# Altium PCB 八入八出继电器工控板.PCBDOC (part 1 of 2)
Units mm, origin at the board's own origin, x right, y up, seen from the top; angles counter-clockwise.
Board outline 152.4 x 101.6 mm, 2 copper layers (Top Layer, Bottom Layer); 79 components, 86 nets, 285 pads, 7 vias.
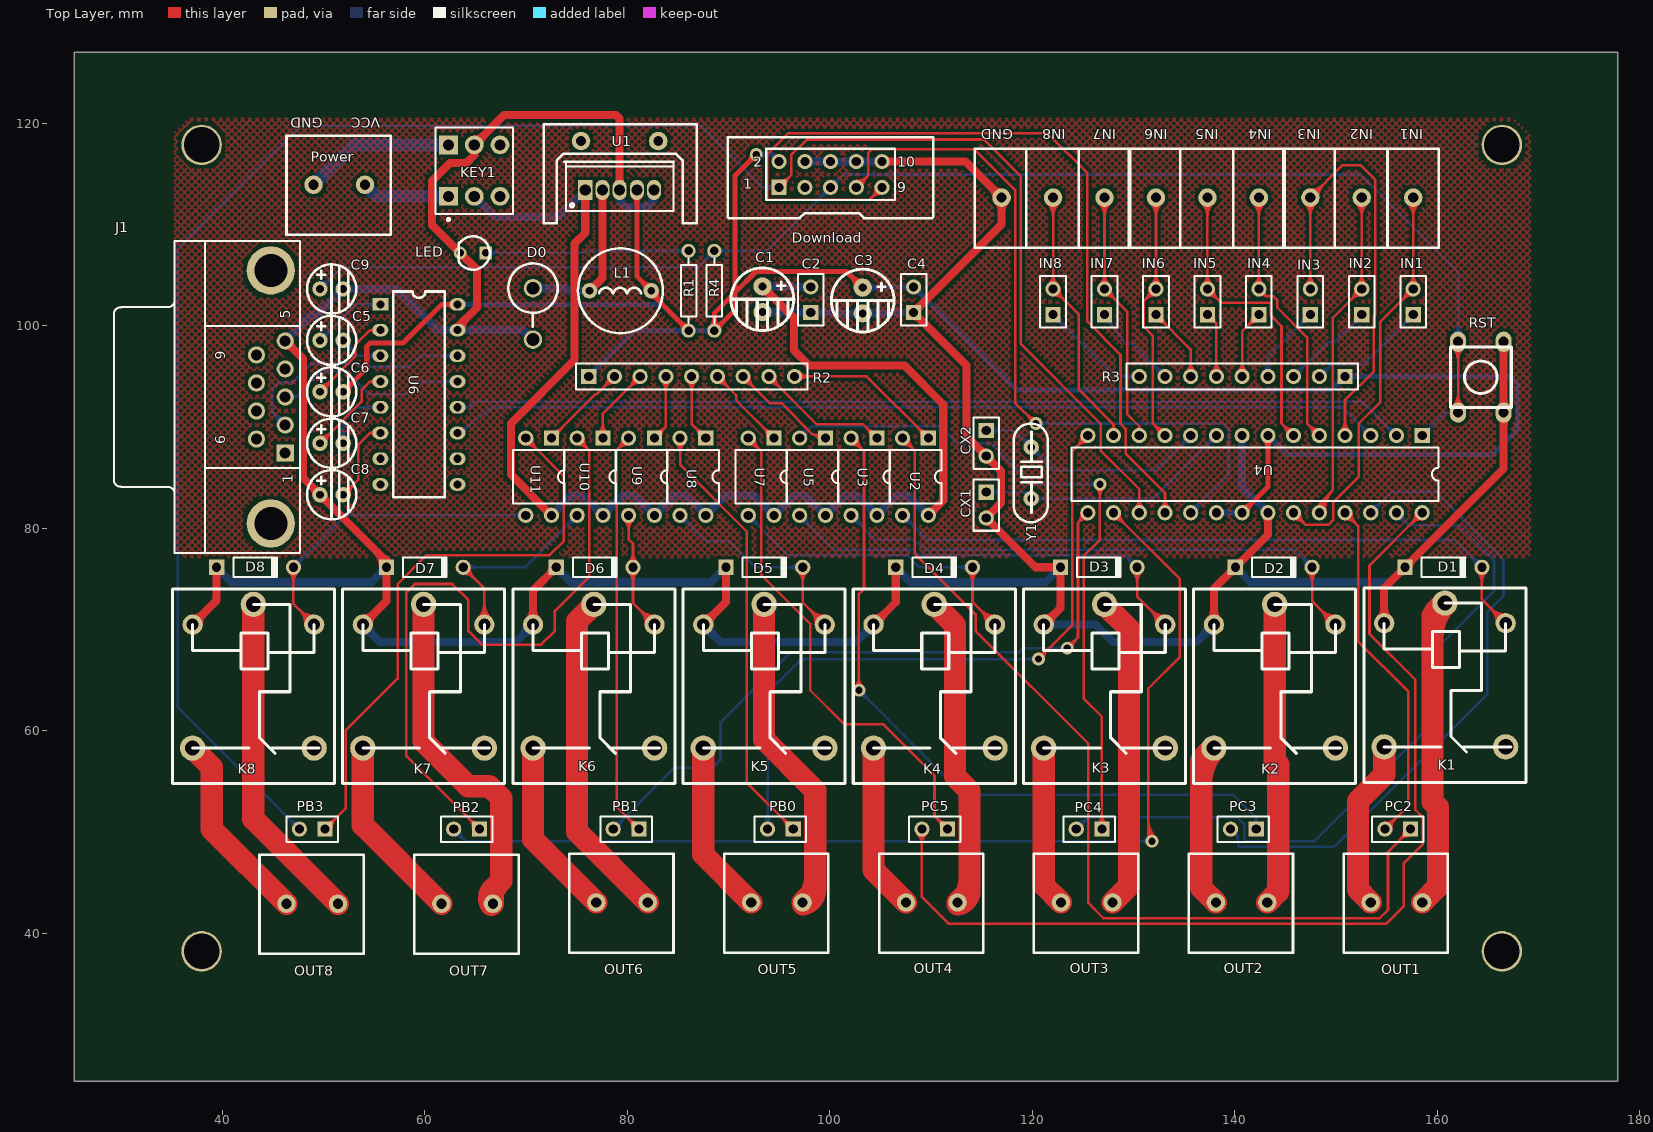
[diagram p0: Top Layer view]
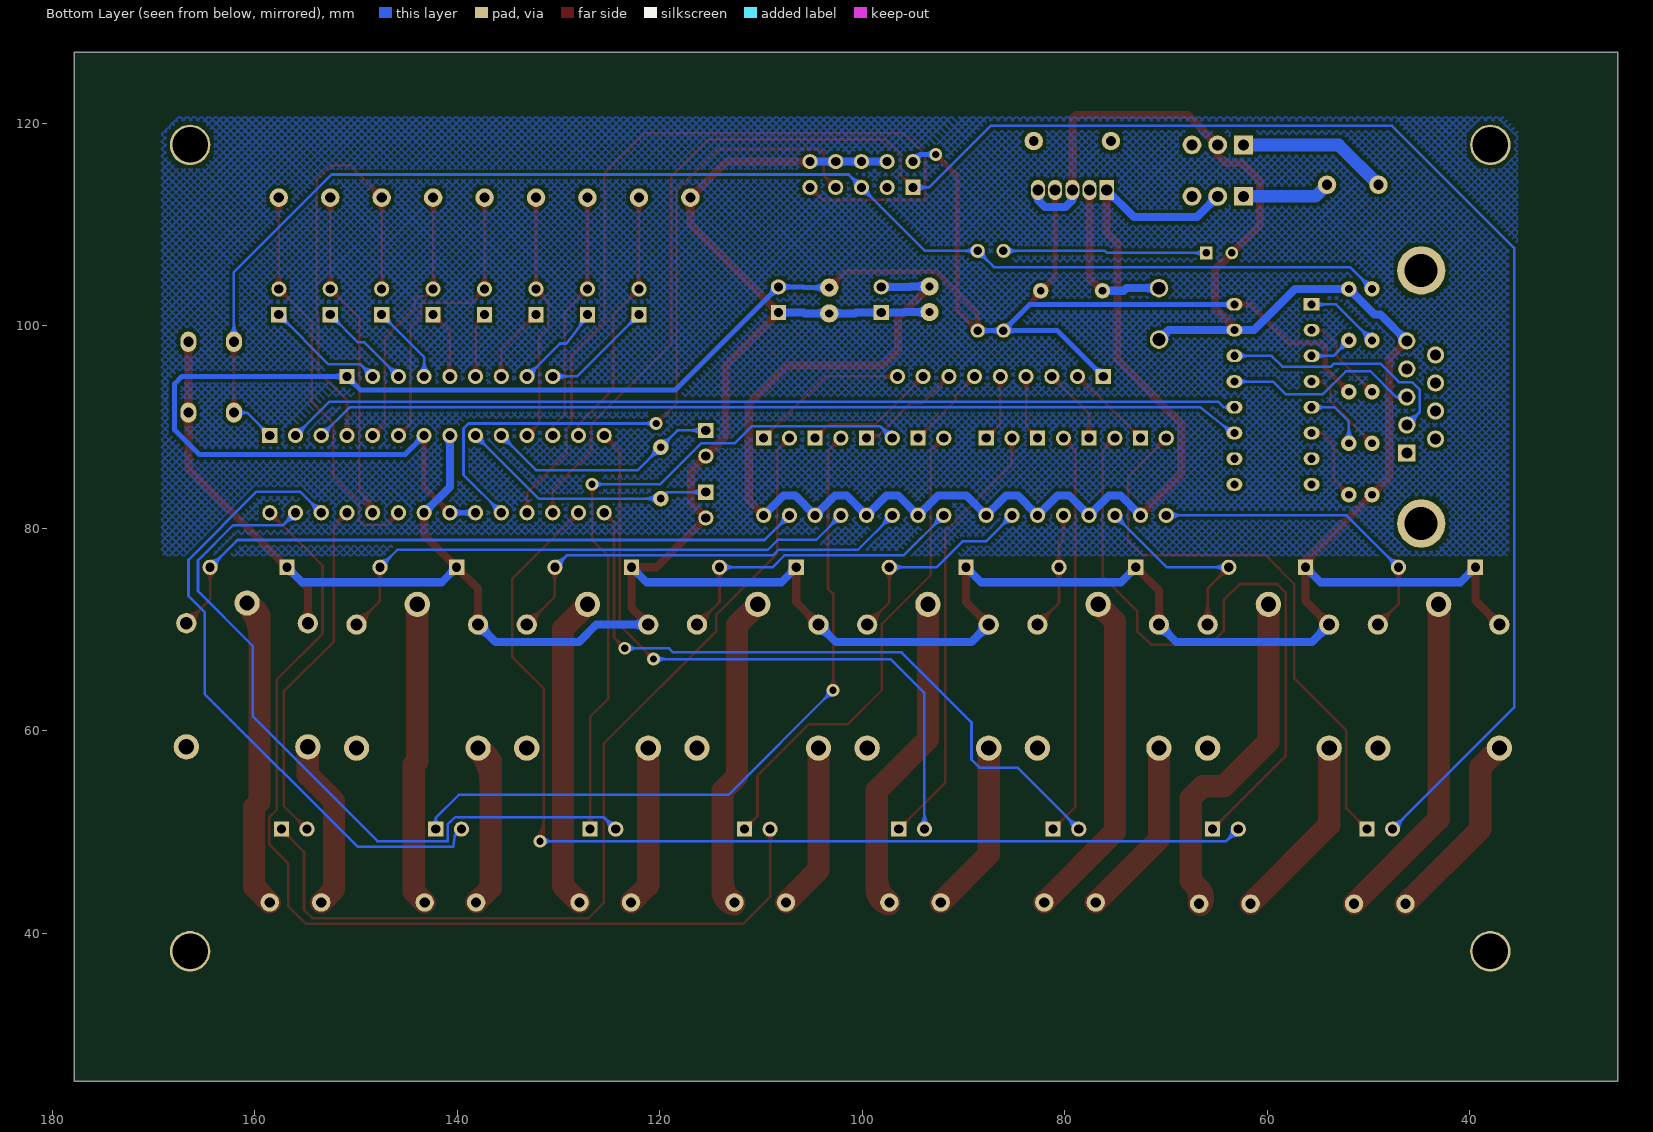
[diagram p1: Bottom Layer view, seen from below]

## Layer stack, top to bottom
Top Layer: signal copper 0.0356
Dielectric: dielectric 0.32, FR-4, Dk 4.8
Bottom Layer: signal copper 0.0356

## Board outline
25.4,25.4 177.8,25.4 177.8,127 25.4,127

## Design rules (kind name [scope] priority, off if disabled: settings)
Clearance [All] p1: gap=0.3
ComponentClearance [All] p1: gap=0.254 collisioncheckmode=3 verticalgap=0.254
PlaneClearance [All] p1: clearance=0.8
PolygonConnect [All] p1: connectstyle=Relief reliefconductorwidth=0.254 reliefentries=4 polygonreliefangle="90 Angle"
RoutingVias [All] p1: holewidth=0.711 width=1.27 viastyle="Through Hole" minholewidth=0.711 minwidth=1.27 maxholewidth=0.711 maxwidth=1.27
SolderMaskExpansion [All] p1: expansion=0.102
TestPointUsage [All] p1: valid=0 allowmultiple=FALSE
Testpoint [All] p1: side=15 testpointundercomponent=TRUE minsize=1.016 maxsize=2.54 preferedsize=1.524 minholesize=0 maxholesize=1.016 preferedholesize=0.813 testpointgrid=0.025 style=1023 order=0123456789
Width Width_7 [InNet('VCC')] p1: maxlimit=0.5 minlimit=0.5 preferedwidth=0.5
Width Width_6 [InNet('NetD0_1')] p2: maxlimit=0.8 minlimit=0.8 preferedwidth=0.8
Width Width_1 [InNet('+12V')] p3: maxlimit=0.8 minlimit=0.8 preferedwidth=0.8
Width Width_3 [InNet('GND')] p4: maxlimit=0.8 minlimit=0.8 preferedwidth=0.8
Width Width_2 [(InNet('NetK1_1') OR InNet('NetK1_3') OR InNet('NetK2_1') OR InNet('NetK2_3') OR InNet('NetK3_1') OR InNet('NetK3_3') OR InNet('NetK4_1') OR InNet('NetK4_3') OR InNet('NetK5_1') OR InNet('NetK5_3') OR InNet('NetK6_1') OR InNet('NetK6_3') OR InNet('NetK7_1') OR InNet('NetK7_3') OR InNet('NetK8_1') OR InNet('NetK8_3'))] p5: maxlimit=2.2 minlimit=2.2 preferedwidth=2.2
Width Width_5 [InNet('NetKEY1_6')] p6: maxlimit=1.254 minlimit=1.254 preferedwidth=1.254
Width Width_4 [InNet('NetKEY1_1')] p7: maxlimit=1.254 minlimit=1.254 preferedwidth=1.254
Width [All] p8: maxlimit=0.254 minlimit=0.254 preferedwidth=0.254
16 further rules are at their usual default settings.

## Classes and differential pairs
component class 八入八出继电器工控板: C1 C2 C3 C4 C5 C6 C7 C8 C9 CX1 CX2 D0 D1 D2 D3 D4 D5 D6 D7 D8 Download IN4 IN5 IN6 IN7 IN8 J1 K1 K2 K3 K4 K5 K6 K7 K8 KEY1 L1 LED OUT1 OUT2 OUT3 OUT4 OUT5 OUT6 OUT7 OUT8 PB0 PC2 PC3 PC4 PC5 Power R1 R2 R3 R4 RST U1 U2 U3 U4 U5 U6 U7 U8 U9 U10 U11 Y1

## Components (designator, comment, footprint, x,y, rotation, side; value= is the part's Value field where it differs from the comment)
C1 "DJDR" C-DJ-6 93.421,101.295 r270 top
C2 "CPDR" CPDR 98.12,102.565 r90 top
C3 "DJDR" C-DJ-6 103.327,101.168 r270 top
C4 "CPDR" CPDR 108.28,102.565 r90 top
C5 "10uf" C-DJ-4 52.07,96.012 r0 top
C6 "10uf" C-DJ-4 52.07,90.932 r0 top
C7 "10uf" C-DJ-4 52.07,85.852 r0 top
C8 "10uf" C-DJ-4 52.07,80.772 r0 top
C9 "10uf" C-DJ-4 52.07,101.092 r0 top
CX1 "30p" HDR1X2 115.443,83.566 r270 top
CX2 "30p" HDR1X2 115.443,89.662 r270 top
D0 "WY2JG" ZCDZL 73.228,101.168 r0 top
D1 "ZL2JG" D-ZL-10 164.338,76.2 r0 top
D2 "ZL2JG" D-ZL-10 147.574,76.2 r0 top
D3 "ZL2JG" D-ZL-10 130.302,76.2 r0 top
D4 "ZL2JG" D-ZL-10 114.046,76.2 r0 top
D5 "ZL2JG" D-ZL-10 97.282,76.2 r0 top
D6 "ZL2JG" D-ZL-10 80.518,76.2 r0 top
D7 "ZL2JG" D-ZL-10 63.754,76.2 r0 top
D8 "ZL2JG" D-ZL-10 46.99,76.2 r0 top
Download "Download" HDR-2x5 100.076,113.792 r0 top (schematic designator 1)
IN1 "LED" HDR1X2 157.607,101.092 r90 top (schematic designator PD1)
IN1 "PZ_3" JK128_3 152.654,110.744 r270 top
IN2 "LED" HDR1X2 152.527,101.092 r90 top (schematic designator PD2)
IN2 "PZ_3" JK128_3 137.414,110.744 r270 top
IN3 "LED" HDR1X2 147.447,101.092 r90 top (schematic designator PD3)
IN3 "" JK128_3 122.174,110.744 r270 top
IN4 "LED" HDR1X2 142.367,101.092 r90 top (schematic designator PD4)
IN5 "LED" HDR1X2 137.287,101.092 r90 top (schematic designator PD5)
IN6 "LED" HDR1X2 132.207,101.092 r90 top (schematic designator PD6)
IN7 "LED" HDR1X2 127.127,101.092 r90 top (schematic designator PD7)
IN8 "LED" HDR1X2 122.047,101.092 r90 top (schematic designator PD8)
J1 "D Connector 9" DSUB1.385-2H9 35.306,92.964 r90 top
K1 "JDQYCK" JQC-3F/T73 155.248,72.136 r270 top
K2 "JDQYCK" JQC-3F/T73 138.44,72.009 r270 top
K3 "JDQYCK" JQC-3F/T73 121.632,72.009 r270 top
K4 "JDQYCK" JQC-3F/T73 104.824,72.009 r270 top
K5 "JDQYCK" JQC-3F/T73 88.016,72.009 r270 top
K6 "JDQYCK" JQC-3F/T73 71.208,72.009 r270 top
K7 "JDQYCK" JQC-3F/T73 54.4,72.009 r270 top
K8 "JDQYCK" JQC-3F/T73 37.592,72.009 r270 top
KEY1 "SW-DPST" DPDT-6 64.897,115.316 r90 top
L1 "DG" L_DG 82.372,105.232 r0 top
LED "LED" LED_D 64.262,105.664 r180 top
OUT1 "PZ_2" DYDZ 157.988,41.91 r270 top
OUT2 "PZ_2" DYDZ 142.693,41.91 r270 top
OUT3 "PZ_2" DYDZ 127.399,41.91 r270 top
OUT4 "PZ_2" DYDZ 112.105,41.91 r270 top
OUT5 "PZ_2" DYDZ 96.81,41.91 r270 top
OUT6 "PZ_2" DYDZ 81.516,41.91 r270 top
OUT7 "PZ_2" DYDZ 66.221,41.783 r270 top
OUT8 "PZ_2" DYDZ 50.927,41.783 r270 top
PB0 "" CPDR 95.123,50.292 r180 top (schematic designator PB1)
PB1 "" CPDR 79.883,50.292 r180 top (schematic designator PB2)
PB2 "" CPDR 64.135,50.292 r180 top (schematic designator PB3)
PB3 "" CPDR 48.895,50.292 r180 top (schematic designator PB4)
PC2 "" CPDR 156.083,50.292 r180 top (schematic designator PC1)
PC3 "" CPDR 140.843,50.292 r180 top (schematic designator PC2)
PC4 "" CPDR 125.603,50.292 r180 top (schematic designator PC3)
PC5 "" CPDR 110.363,50.292 r180 top (schematic designator PC4)
Power "PZ_2" JK128_2 53.594,112.776 r270 top (schematic designator Prower)
R1 "Res" RSE 86.055,103.454 r270 top
R2 "" HDR-9 91.44,94.996 r0 top
R3 "" HDR-9 135.636,94.996 r180 top
R4 "10k" RSE 88.595,103.454 r270 top
RST "" an-6*6 169.418,101.092 r90 top
U1 "LM2576T5.0" T05A 79.248,113.411 r0 top
U2 "GO" DIP-4 108.458,85.09 r180 top
U3 "GO" DIP-4 103.378,85.09 r180 top
U4 "ATmega8" DIP-28 141.986,85.344 r180 top
U5 "GO" DIP-4 98.298,85.09 r180 top
U6 "MAX232" DIP16 55.626,102.108 r0 top
U7 "GO" DIP-4 93.218,85.09 r180 top
U8 "GO" DIP-4 86.487,85.09 r180 top
U9 "GO" DIP-4 81.407,85.09 r180 top
U10 "GO" DIP-4 76.327,85.09 r180 top
U11 "GO" DIP-4 71.247,85.09 r180 top
Y1 "Y" JZ_ZC 119.888,82.931 r270 top
? "Comment" SRP 79.248,114.427 r0 top

## Footprints (in the part's own frame and the unit in brackets; to place one, negate y for a bottom-side part, rotate by r counter-clockwise, add the part's x,y. Pads: shape width x height; smd on the part's side, far side on the other; paste and mask are expansions set on the pad)
an-6*6 [mm] "按键"
  oval 2x1.6 hole 1: 1(-9.675,7.381) 1(-2.675,7.381) 2(-9.675,2.881) 2(-2.675,2.881)
  silkscreen extent -9.17,2.13 -3.17,8.13
C-DJ-4 [mil] "电容4mm"
  round 60 hole 30: 1(-95,100) 2(-5,100)
  silkscreen extent -145,5 46,195
C-DJ-6 [mm] "电容6mm"
  round 1.8 hole 0.8: 1(-2.591,-0.076) 2(-0.051,-0.076)
  silkscreen extent -4.42,-3.18 1.78,3.02
CPDR [mm] "瓷片电容"
  rect 1.5x1.5 hole 0.9: 1(-1.27,0)
  round 1.5 hole 0.9: 2(1.27,0)
  silkscreen extent -2.54,-1.27 2.54,1.27
D-ZL-10 [mm] "整流二极管"
  rect 1.5x1.5 hole 0.9: 1(-7.532,-0.051)
  round 1.5 hole 0.9: 2(0.048,-0.051)
  silkscreen extent -5.89,-1 -1.5,0.9
DIP16 [mil] "直插16管脚"
  rect 62x49.21 hole 32: 1(-0.15,-0.04)
  oval 62x49.21 hole 32: 2(-0.15,-100.04) 3(-0.15,-200.04) 4(-0.15,-300.04) 5(-0.15,-400.04) 6(-0.15,-500.04) 7(-0.15,-600.04) 8(-0.15,-700.04) 9(299.85,-700.04) 10(299.85,-600.04) 11(299.85,-500.04) 12(299.85,-400.04) 13(299.85,-300.04) 14(299.85,-200.04) 15(299.85,-100.04) 16(299.85,-0.04)
  silkscreen extent 50,-750 250,50
DIP-4 [mm] "DIP; 4 Leads; Row Spacing 7.62 mm; Pitch 2.54 mm"
  rect 1.5x1.5 hole 0.9: 1(-1.27,-3.81)
  round 1.5 hole 0.9: 2(1.27,-3.81) 3(1.27,3.81) 4(-1.27,3.81)
  silkscreen extent -2.55,-2.65 2.55,2.65
DIP-28 [mm] "直插28管脚"
  rect 1.5x1.5 hole 0.9: 1(-16.51,-3.81)
  round 1.5 hole 0.9: 2(-13.97,-3.81) 3(-11.43,-3.81) 4(-8.89,-3.81) 5(-6.35,-3.81) 6(-3.81,-3.81) 7(-1.27,-3.81) 8(1.27,-3.81) 9(3.81,-3.81) 10(6.35,-3.81) 11(8.89,-3.81) 12(11.43,-3.81) 13(13.97,-3.81) 14(16.51,-3.81) 15(16.51,3.81) 16(13.97,3.81) 17(11.43,3.81) 18(8.89,3.81) 19(6.35,3.81) 20(3.81,3.81) 21(1.27,3.81) 22(-1.27,3.81) 23(-3.81,3.81) 24(-6.35,3.81) 25(-8.89,3.81) 26(-11.43,3.81) 27(-13.97,3.81) 28(-16.51,3.81)
  silkscreen extent -18.1,-2.65 18.1,2.65
DPDT-6 [mm] "Double-Pole, Double-Throw Switch; 6 Leads"
  rect 1.85x1.85 hole 1.1: 1(-2.54,2.54) 6(2.54,2.54)
  round 1.85 hole 1.1: 2(-2.54,0) 3(-2.54,-2.54) 4(2.54,-2.54) 5(2.54,0)
  silkscreen extent -4.96,-3.81 4.28,3.81
DSUB1.385-2H9 [mm] "Connector; D Subminiature; 9 Position; Right Angle; Pitch 1.385 mm"
  rect 1.69x1.69 hole 1.09: 1(-5.54,-10.92)
  round 1.69 hole 1.09: 2(-2.77,-10.92) 3(0,-10.92) 4(2.77,-10.92) 5(5.54,-10.92) 6(-4.155,-8.08) 7(-1.385,-8.08) 8(1.385,-8.08) 9(4.155,-8.08)
  round 4.76 hole 3.26: 10(-12.495,-9.5) 11(12.495,-9.5)
  silkscreen extent -15.4,-12.4 15.4,6
DYDZ [mil] "接线端子"
  round 71.81 hole 39.37: 1(-45,20) 2(-45,-180)
  silkscreen extent -235,-285 150,120
HDR1X2 [mm] "Connector; Header; 2 Position"
  rect 1.5x1.5 hole 0.9: 1(0,0)
  round 1.5 hole 0.9: 2(2.54,0)
  silkscreen extent -1.27,-1.27 3.81,1.27
HDR-2x5 [mm] "下载口"
  rect 1.5x1.5 hole 0.9: 1(-5.08,-0.127)
  round 1.5 hole 0.9: 2(-5.08,2.413) 3(-2.54,-0.127) 4(-2.54,2.413) 5(0,-0.127) 6(0,2.413) 7(2.54,-0.127) 8(2.54,2.413) 9(5.08,-0.127) 10(5.08,2.413)
  silkscreen extent -10.16,-3.17 10.16,4.83
HDR-9 [mm] "9排针"
  rect 1.5x1.5 hole 0.9: 1(-15.24,0)
  round 1.5 hole 0.9: 2(-12.7,0) 3(-10.16,0) 4(-7.62,0) 5(-5.08,0) 6(-2.54,0) 7(0,0) 8(2.54,0) 9(5.08,0)
  silkscreen extent -16.51,-1.27 6.35,1.27
JK128_2 [mil] "接线端子"
  round 71.81 hole 39.37: 1(-45,20) 2(-45,-180)
  silkscreen extent -235,-285 150,120
JK128_3 [mm] "接线端子_3"
  round 1.824 hole 1: 1(-1.905,4.953) 2(-1.905,-0.127) 3(-1.905,-5.207)
  silkscreen extent -6.73,-7.87 3.05,7.49
JQC-3F/T73 [mm] "继电器"
  round 2.5 hole 1.5: 1(13.716,-0.508) 2(13.716,11.492) 3(-0.484,5.492)
  round 2 hole 1.2: 4(1.516,11.492) 5(1.516,-0.508)
  silkscreen extent -1.98,-2.51 17.22,13.49
JZ_ZC [mil] "晶振"
  round 60 hole 30: 1(-200,0) 2(0,0)
  silkscreen extent -292,-68 92,65
L_DG [mil] "100mH 电感"
  round 60 hole 30: 1(-240,-70) 2(0,-70)
  silkscreen extent -285,-235 45,95
LED_D [mm] "发光二极管_3mm"
  rect 1.25x1.25 hole 0.75: 1(-1.778,-1.524)
  round 1.25 hole 0.75: 2(0.762,-1.524)
  silkscreen extent -2.16,-3.17 0.89,0.13
RSE [mm] "直插电阻1/8W"
  round 1.4 hole 0.85: 1(-3.937,0) 2(3.937,0)
  silkscreen extent -3.17,-0.76 3.17,0.76
SRP [mm] "散热片78XX"
  round 1.824 hole 0.962: 0(-3.81,3.81) 0(3.81,3.81)
  silkscreen extent -7.49,-4.32 7.62,5.46
T05A [mm] "LM2576"
  rect 1.4x2 hole 1.1: 1(-3.4,0)
  oval 1.4x2 hole 1.1: 2(-1.7,0) 3(0,0) 4(1.7,0) 5(3.4,0)
  silkscreen extent -5.3,-2.1 5.3,2.8
ZCDZL [mm] "直插电阻立式插"
  round 1.824 hole 1.262: 1(-2.54,2.54) 2(-2.54,-2.54)
  silkscreen extent -4.98,-1.27 -0.1,4.98

## Part data
C1 C3: "电解电容"
C2 C4: "瓷片电容"
C5 C6 C7 C8 C9: library part "CAPACITOR POL", "Capacitor"
CX1 CX2: library part CAP, "Capacitor"
D0: "稳压二级管"
D1 D2 D3 D4 D5 D6 D7 D8: "整流二极管"
Download: library part "Header 5X2", "Header, 5-Pin, Dual row"
IN1 IN2: "排针——3"
IN3: library part PZ_3, "排针——3"
J1: "Receptacle Assembly, 9 Position, Right Angle"
K1 K2 K3 K4 K5 K6 K7 K8: "继电器——1常开1常闭"
KEY1: "Double-Pole, Single-Throw Switch"
L1: "电感"
LED: "发光二极管"
OUT1 OUT2 OUT3 OUT4 OUT5 OUT6 OUT7 OUT8 Power: "排针——2"
PB0 PB1 PB2 PB3 PC2 PC3 PC4 PC5: library part LED, "发光二极管"
R1: "电阻"
R2 R3: library part "Res PZ_8", "8位排阻"
R4: library part RES2
RST: library part SW-PB, "Switch"
U1: library part LM2576HVT-3.3, "Simple Switcher 3A Step Down Voltage Regulator"
U2 U3 U5 U7 U8 U9 U10 U11: "光耦"
U4: library part ATmega8-P, "8 位微处理器/28引脚"
Y1: library part CRYSTAL, "Crystal"

## Free pads (board coordinates)
  round 4 hole 3.5: 0(37.973,117.856) 1(37.973,38.227) 2(166.37,38.227) 3(166.37,117.856)

## Via types
v1: diameter 1.27, hole 0.711, Top Layer to Bottom Layer, 7 vias

## Nets (pads, with @x,y where several pads share a name; then routed paths per layer and width w, separated by ;. In a path a pad name is that pad's centre, name@x,y a point inside that pad or via, vN(x,y) a via of type N, cw(c..) or ccw(c..) an arc to the next point about the centre after c; other vN are vias at no path point)
+12V: C1.1 C2.2 KEY1.2 U1.1 U2.4 U3.4 U5.4 U7.4 U8.4 U9.4 U10.4 U11.4 | length 169.8
  Top Layer w0.8: U11.4@72.167,81.28 ccw(c71.322,81.28) 71.92,81.877 ccw(c72.517,82.475) U11.4@72.517,81.63 ; U11.4@72.517,81.28 68.504,85.293 68.504,90.348 74.803,96.647 74.803,108.102 75.848,109.147 U1.1@75.848,113.411 ; U1.1@75.636,112.899 cw(c75.124,112.387) 75.848,112.387 cw(c76.572,112.387) U1.1@76.06,112.899 ; C1.1@93.345,103.386 cw(c93.345,102.179) 94.199,103.032 cw(c95.052,103.886) C1.1@93.845,103.886 ; C1.1@93.345,103.886 96.469,100.762 96.469,97.561 97.968,96.063 107.366,96.063 111.201,92.227 111.201,82.753 U2.4@109.728,81.28 ; U2.4@109.728,81.63 ccw(c109.728,82.475) 110.325,81.877 ccw(c110.923,81.28) U2.4@110.078,81.28
  Bottom Layer w0.8: KEY1.2@64.897,112.251 cw(c64.897,110.984) 65.793,111.88 cw(c66.689,112.776) KEY1.2@65.422,112.776 ; KEY1.2@64.897,112.776 66.954,110.719 73.156,110.719 U1.1@75.848,113.411 ; U11.4@72.517,81.28 74.473,83.236 75.641,83.236 U10.4@77.597,81.28 79.553,83.236 80.721,83.236 U9.4@82.677,81.28 84.633,83.236 85.801,83.236 U8.4@87.757,81.28 89.713,83.236 92.532,83.236 U7.4@94.488,81.28 96.444,83.236 97.612,83.236 U5.4@99.568,81.28 101.524,83.236 102.692,83.236 U3.4@104.648,81.28 106.604,83.236 107.772,83.236 U2.4@109.728,81.28 ; U11.4@72.517,81.63 ccw(c72.517,82.475) 73.114,81.877 ccw(c73.712,81.28) U11.4@72.867,81.28 ; 74.824,112.387 cw(c75.848,111.362) U1.1@75.848,112.811 ; U10.4@77.247,81.28 ccw(c76.402,81.28) 77,81.877 ccw(c77.597,82.475) 77.597,81.63 ccw(c77.597,82.475) 78.194,81.877 ccw(c78.792,81.28) U10.4@77.947,81.28 ; U9.4@82.327,81.28 ccw(c81.482,81.28) 82.08,81.877 ccw(c82.677,82.475) 82.677,81.63 ccw(c82.677,82.475) 83.274,81.877 ccw(c83.872,81.28) U9.4@83.027,81.28 ; U8.4@87.407,81.28 ccw(c86.562,81.28) 87.16,81.877 ccw(c87.757,82.475) 87.757,81.63 ccw(c87.757,82.475) 88.354,81.877 ccw(c88.952,81.28) U8.4@88.107,81.28 ; C1.1@93.345,103.886 95.25,103.886 95.301,103.835 C2.2@98.12,103.835 ; C1.1@93.699,103.532 cw(c94.552,102.679) 94.552,103.886 cw(c94.552,105.093) C1.1@93.699,104.24 ; U7.4@94.138,81.28 ccw(c93.293,81.28) 93.891,81.877 ccw(c94.488,82.475) 94.488,81.63 ccw(c94.488,82.475) 95.085,81.877 ccw(c95.683,81.28) U7.4@94.838,81.28 ; C2.2@97.873,103.588 ccw(c97.275,102.99) 97.275,103.835 ccw(c97.275,104.68) C2.2@97.873,104.083 ; U5.4@99.218,81.28 ccw(c98.373,81.28) 98.971,81.877 ccw(c99.568,82.475) 99.568,81.63 ccw(c99.568,82.475) 100.165,81.877 ccw(c100.763,81.28) U5.4@99.918,81.28 ; U3.4@104.298,81.28 ccw(c103.453,81.28) 104.051,81.877 ccw(c104.648,82.475) 104.648,81.63 ccw(c104.648,82.475) 105.245,81.877 ccw(c105.843,81.28) U3.4@104.998,81.28 ; U2.4@109.378,81.28 ccw(c108.533,81.28) 109.131,81.877 ccw(c109.728,82.475) U2.4@109.728,81.63
GND: C1.2 C2.1 C3.2 C4.1 C8.1 C9.2 CX1.2 CX2.2 D0.2 D1.1 D2.1 D3.1 D4.1 D5.1 D6.1 D7.1 D8.1 Download.4 Download.6 Download.8 Download.10 IN3.3 J1.5 K1.5 K2.5 K3.5 K4.5 K5.5 K6.5 K7.5 K8.5 KEY1.5 LED.2 RST.2 U1.3 U1.5 U4.8 U4.22 U6.15 | length 534.5
  Top Layer w0.8: K8.5@37.084,70.493 39.458,72.867 D8.1@39.458,76.149 ; K8.5@37.084,71.093 ccw(c37.084,72.542) 38.108,71.517 ccw(c39.133,70.493) K8.5@37.684,70.493 ; D8.1@39.211,75.901 cw(c38.613,75.304) 39.458,75.304 cw(c40.303,75.304) D8.1@39.706,75.901 ; J1.5@46.226,98.059 cw(c46.226,96.985) 46.986,97.744 cw(c47.745,98.504) J1.5@46.671,98.504 ; J1.5@46.226,98.504 47.981,96.749 47.981,84.988 C8.1@49.657,83.312 56.058,76.911 56.222,76.911 ; C8.1@49.295,83.312 ccw(c48.421,83.312) 49.039,83.93 ccw(c49.657,84.548) C8.1@49.657,83.674 ; C8.1@49.657,82.95 cw(c49.657,82.076) 50.275,82.694 cw(c50.893,83.312) C8.1@50.019,83.312 ; K7.5@53.892,70.493 56.222,72.823 D7.1@56.222,76.149 56.222,76.911 ; K7.5@53.892,71.093 ccw(c53.892,72.542) 54.916,71.517 ccw(c55.941,70.493) K7.5@54.492,70.493 ; 55.202,77.767 cw(c53.583,76.149) D7.1@55.872,76.149 ; 55.759,77.21 cw(c55.201,76.653) D7.1@55.908,76.304 ; D7.1@55.975,75.901 cw(c55.377,75.304) 56.222,75.304 cw(c57.067,75.304) D7.1@56.47,75.901 ; D7.1@55.994,76.414 ccw(c55.567,76.911) 56.222,76.911 ; D7.1@56.45,76.414 cw(c56.878,76.911) 56.222,76.911 ; U6.15@63.242,99.567 63.242,99.869 65.151,101.778 65.151,105.537 LED.2@63.5,107.188 60.731,109.957 60.731,114.3 62.509,116.078 64.135,116.078 64.897,116.84 ; U6.15@63.63,99.567 cw(c65.294,99.567) 64.117,100.744 ; KEY1.5@64.593,117.428 cw(c64.176,116.84) 64.897,116.84 ; KEY1.5@64.897,118.381 ccw(c64.897,119.648) 65.793,118.752 ccw(c66.689,117.856) KEY1.5@65.422,117.856 ; KEY1.5@65.201,117.428 ccw(c65.618,116.84) 64.897,116.84 ; K6.5@70.276,70.917 ccw(c69.252,71.942) 70.7,71.942 ccw(c72.149,71.942) K6.5@71.124,70.917 ; K6.5@70.7,70.493 70.7,73.863 D6.1@72.986,76.149 ; D6.1@72.636,76.149 cw(c71.791,76.149) 72.389,75.551 cw(c72.986,74.954) D6.1@72.986,75.799 ; U1.3@79.036,113.923 ccw(c78.524,114.435) 79.248,114.435 ccw(c79.972,114.435) U1.3@79.46,113.923 ; U1.3@79.248,113.411 79.248,120.447 78.892,120.802 67.843,120.802 KEY1.5@64.897,117.856 64.897,116.84 ; K5.5@87.508,70.493 89.75,72.735 D5.1@89.75,76.149 ; K5.5@87.508,71.093 ccw(c87.508,72.542) 88.532,71.517 ccw(c89.557,70.493) K5.5@88.108,70.493 ; D5.1@89.503,75.901 cw(c88.905,75.304) 89.75,75.304 cw(c90.595,75.304) D5.1@89.998,75.901 ; K4.5@104.316,70.493 106.514,72.691 D4.1@106.514,76.149 ; K4.5@104.316,71.093 ccw(c104.316,72.542) 105.34,71.517 ccw(c106.365,70.493) K4.5@104.916,70.493 ; Download.10@105.156,116.205 113.411,116.205 IN3.3@116.967,112.649 116.967,109.982 C4.1@108.28,101.295 113.513,96.063 113.513,89.052 CX2.2@115.443,87.122 116.916,85.649 116.916,82.499 CX1.2@115.443,81.026 120.32,76.149 D3.1@122.77,76.149 122.77,72.139 K3.5@121.124,70.493 ; Download.10@105.403,115.958 cw(c106.001,115.36) 106.001,116.205 cw(c106.001,117.05) Download.10@105.403,116.452 ; D4.1@106.267,75.901 cw(c105.669,75.304) 106.514,75.304 cw(c107.359,75.304) D4.1@106.762,75.901 ; C4.1@108.28,100.945 cw(c108.28,100.1) 108.878,100.698 cw(c109.475,101.295) 108.63,101.295 cw(c109.475,101.295) 108.878,101.893 cw(c108.28,102.49) C4.1@108.28,101.645 ; CX2.2@115.093,87.122 ccw(c114.248,87.122) 114.846,87.719 ccw(c115.443,88.317) CX2.2@115.443,87.472 ; CX1.2@115.443,80.676 cw(c115.443,79.831) 116.04,80.429 cw(c116.638,81.026) 115.793,81.026 cw(c116.638,81.026) 116.04,81.623 cw(c115.443,82.221) CX1.2@115.443,81.376 ; CX2.2@115.443,86.772 cw(c115.443,85.927) 116.04,86.525 cw(c116.638,87.122) CX2.2@115.793,87.122 ; IN3.3@116.455,112.649 ccw(c115.219,112.649) 116.093,113.523 ccw(c116.967,114.397) IN3.3@116.967,113.161 ; IN3.3@116.605,112.287 cw(c115.731,111.413) 116.967,111.413 cw(c118.203,111.413) IN3.3@117.329,112.287 ; K3.5@121.124,71.093 ccw(c121.124,72.542) 122.148,71.517 ccw(c123.173,70.493) K3.5@121.724,70.493 ; D3.1@122.523,76.396 cw(c121.925,76.994) 121.925,76.149 cw(c121.925,75.304) 122.523,75.901 cw(c121.925,75.304) 122.77,75.304 cw(c123.615,75.304) D3.1@123.018,75.901 ; K2.5@137.508,70.917 ccw(c136.483,71.942) 137.932,71.942 ccw(c139.381,71.942) K2.5@138.356,70.917 ; K2.5@137.932,70.493 137.932,74.039 D2.1@140.042,76.149 143.256,79.363 U4.22@143.256,81.534 ; D2.1@139.692,76.149 cw(c138.847,76.149) 139.445,75.551 cw(c140.042,74.954) D2.1@140.042,75.799 ; D2.1@140.042,76.499 ccw(c140.042,77.344) 140.64,76.746 ccw(c141.237,76.149) D2.1@140.392,76.149 ; U4.22@143.009,81.287 cw(c142.411,80.689) 143.256,80.689 cw(c144.101,80.689) U4.22@143.503,81.287 ; K1.5@154.316,71.044 ccw(c153.291,72.069) 154.74,72.069 ccw(c156.189,72.069) K1.5@155.164,71.044 ; K1.5@154.74,70.62 154.74,74.083 D1.1@156.806,76.149 166.537,85.88 RST.2@166.537,91.417 RST.2@166.537,98.417 ; D1.1@156.456,76.149 cw(c155.611,76.149) 156.209,75.551 cw(c156.806,74.954) D1.1@156.806,75.799 ; D1.1@156.806,76.499 ccw(c156.806,77.344) 157.404,76.746 ccw(c158.001,76.149) D1.1@157.156,76.149 ; RST.2@166.254,90.934 cw(c165.572,90.251) 166.537,90.251 cw(c167.503,90.251) RST.2@166.82,90.934 ; RST.2@166.254,91.9 ccw(c165.572,92.583) 166.537,92.583 ccw(c167.503,92.583) RST.2@166.82,91.9 ; RST.2@166.254,97.934 cw(c165.572,97.251) 166.537,97.251 cw(c167.503,97.251) RST.2@166.82,97.934
  Bottom Layer w0.8: D8.1@39.458,75.799 cw(c39.458,74.954) 40.056,75.551 cw(c40.653,76.149) D8.1@39.808,76.149 ; D8.1@39.458,76.149 40.931,74.676 54.749,74.676 D7.1@56.222,76.149 ; J1.5@46.226,98.504 48.814,101.092 49.403,101.092 C9.2@51.943,103.632 57.251,103.632 61.316,99.567 U6.15@63.242,99.567 69.749,99.567 D0.2@70.688,98.628 ; J1.5@46.226,98.949 ccw(c46.226,100.023) 46.986,99.264 ccw(c47.745,98.504) J1.5@46.671,98.504 ; C9.2@51.581,103.632 cw(c50.707,103.632) 51.325,103.014 cw(c51.943,102.396) C9.2@51.943,103.27 ; C9.2@52.199,103.376 cw(c52.817,102.758) 52.817,103.632 cw(c52.817,104.506) C9.2@52.199,103.888 ; K7.5@53.892,69.893 cw(c53.892,68.444) 54.916,69.469 cw(c55.941,70.493) K7.5@54.492,70.493 ; K7.5@53.892,70.493 55.602,68.783 68.99,68.783 K6.5@70.7,70.493 ; D7.1@55.872,76.149 cw(c55.027,76.149) 55.625,75.551 cw(c56.222,74.954) D7.1@56.222,75.799 ; K6.5@70.1,70.493 cw(c68.652,70.493) 69.676,69.469 cw(c70.7,68.444) K6.5@70.7,69.893 ; D0.2@70.176,98.628 ccw(c68.94,98.628) 69.814,99.502 ccw(c70.688,100.376) D0.2@70.688,99.14 ; D6.1@72.986,75.799 cw(c72.986,74.954) 73.584,75.551 cw(c74.181,76.149) D6.1@73.336,76.149 ; D6.1@72.986,76.149 74.459,74.676 88.277,74.676 D5.1@89.75,76.149 ; U1.3@79.248,113.411 79.248,112.395 ; U1.3@79.495,112.941 ccw(c80.061,112.553) 79.576,112.067 ; 82.32,112.067 ccw(c81.835,112.553) U1.5@82.401,112.941 ; U1.5@82.438,112.897 cw(c81.944,112.395) 82.648,112.395 ; U1.5@82.648,113.411 82.648,112.395 ; U1.5@82.858,112.897 ccw(c83.352,112.395) 82.648,112.395 ; K5.5@87.508,69.893 cw(c87.508,68.444) 88.532,69.469 cw(c89.557,70.493) K5.5@88.108,70.493 ; K5.5@87.508,70.493 89.218,68.783 102.606,68.783 K4.5@104.316,70.493 ; D5.1@89.4,76.149 cw(c88.555,76.149) 89.153,75.551 cw(c89.75,74.954) D5.1@89.75,75.799 ; C1.2@93.345,101.346 95.707,101.346 95.758,101.295 C2.1@98.12,101.295 100.635,101.295 100.711,101.219 C3.2@103.251,101.219 105.715,101.219 105.791,101.295 C4.1@108.28,101.295 ; C1.2@93.699,100.992 cw(c94.552,100.139) 94.552,101.346 cw(c94.552,102.553) C1.2@93.699,101.7 ; Download.4@97.536,116.205 Download.6@100.076,116.205 Download.8@102.616,116.205 Download.10@105.156,116.205 ; Download.4@97.783,115.958 cw(c98.381,115.36) 98.381,116.205 cw(c98.381,117.05) Download.4@97.783,116.452 ; C2.1@97.873,101.048 ccw(c97.275,100.45) 97.275,101.295 ccw(c97.275,102.14) C2.1@97.873,101.543 ; C2.1@98.368,101.048 cw(c98.965,100.45) 98.965,101.295 cw(c98.965,102.14) C2.1@98.368,101.543 ; Download.6@99.829,115.958 ccw(c99.231,115.36) 99.231,116.205 ccw(c99.231,117.05) Download.6@99.829,116.452 ; Download.6@100.323,115.958 cw(c100.921,115.36) 100.921,116.205 cw(c100.921,117.05) Download.6@100.323,116.452 ; Download.8@102.369,115.958 ccw(c101.771,115.36) 101.771,116.205 ccw(c101.771,117.05) Download.8@102.369,116.452 ; Download.8@102.863,115.958 cw(c103.461,115.36) 103.461,116.205 cw(c103.461,117.05) Download.8@102.863,116.452 ; C3.2@102.897,100.865 ccw(c102.044,100.012) 102.044,101.219 ccw(c102.044,102.426) C3.2@102.897,101.573 ; C3.2@103.605,100.865 cw(c104.458,100.012) 104.458,101.219 cw(c104.458,102.426) C3.2@103.605,101.573 ; K4.5@103.716,70.493 cw(c102.268,70.493) 103.292,69.469 cw(c104.316,68.444) K4.5@104.316,69.893 ; Download.10@104.909,115.958 ccw(c104.311,115.36) 104.311,116.205 ccw(c104.311,117.05) Download.10@104.909,116.452 ; D4.1@106.514,75.799 cw(c106.514,74.954) 107.112,75.551 cw(c107.709,76.149) D4.1@106.864,76.149 ; D4.1@106.514,76.149 107.987,74.676 121.297,74.676 D3.1@122.77,76.149 ; C4.1@108.033,101.048 ccw(c107.435,100.45) 107.435,101.295 ccw(c107.435,102.14) C4.1@108.033,101.543 ; K3.5@121.124,70.493 126.263,70.493 127.973,68.783 136.222,68.783 K2.5@137.932,70.493 ; K3.5@121.548,70.069 cw(c122.573,69.044) 122.573,70.493 cw(c122.573,71.942) K3.5@121.548,70.917 ; D3.1@122.42,76.149 cw(c121.575,76.149) 122.173,75.551 cw(c122.77,74.954) D3.1@122.77,75.799 ; K2.5@137.332,70.493 cw(c135.883,70.493) 136.908,69.469 cw(c137.932,68.444) K2.5@137.932,69.893 ; D2.1@140.042,75.799 cw(c140.042,74.954) 140.64,75.551 cw(c141.237,76.149) D2.1@140.392,76.149 ; D2.1@140.042,76.149 141.515,74.676 155.333,74.676 D1.1@156.806,76.149 ; U4.8@140.469,88.907 cw(c139.871,88.309) 140.716,88.309 cw(c141.561,88.309) U4.8@140.963,88.907 ; U4.8@140.716,89.154 140.716,84.074 U4.22@143.256,81.534 ; U4.22@142.906,81.534 ccw(c142.061,81.534) 142.659,82.131 ccw(c143.256,82.729) U4.22@143.256,81.884 ; D1.1@156.456,76.149 cw(c155.611,76.149) 156.209,75.551 cw(c156.806,74.954) D1.1@156.806,75.799 ; 79.248,112.395 cw(c79.952,112.395) 79.458,112.897 ccw(c79.952,112.395) 79.248,112.395 ; 79.248,112.395 ccw(c78.544,112.395) 79.038,112.897 cw(c78.544,112.395) 79.248,112.395 ; 79.248,112.395 79.934,111.709 81.962,111.709 82.648,112.395
NetC5_1: C5.1 U6.1 | length 13.2
  Bottom Layer w0.254: C5.1@49.657,98.552 53.212,102.107 U6.1@55.622,102.107 ; C5.1@49.657,98.933 ccw(c49.657,99.853) 50.307,99.202 ccw(c50.958,98.552) C5.1@50.038,98.552 ; C5.1@49.657,99.187 ccw(c49.657,100.72) 50.741,99.636 ccw(c51.825,98.552) C5.1@50.292,98.552 ; U6.1@55.108,101.755 ccw(c54.258,100.905) 54.258,102.107 ccw(c54.258,103.309) U6.1@55.108,102.459
NetC5_2: C5.2 U6.3 | length 10.1
  Bottom Layer w0.254: C5.2@51.943,97.917 cw(c51.943,96.384) 53.027,97.468 cw(c54.111,98.552) C5.2@52.578,98.552 ; C5.2@51.943,98.171 cw(c51.943,97.251) 52.593,97.902 cw(c53.244,98.552) C5.2@52.324,98.552 ; C5.2@51.943,98.552 53.468,97.027 U6.3@55.622,97.027 ; U6.3@55.108,96.675 ccw(c54.258,95.825) 54.258,97.027 ccw(c54.258,98.229) U6.3@55.108,97.379
NetC6_1: C6.1 U6.2 | length 14
  Top Layer w0.254: C6.1@49.657,93.472 53.137,96.952 53.137,98.094 54.61,99.567 ; C6.1@49.657,93.853 ccw(c49.657,94.773) 50.307,94.122 ccw(c50.958,93.472) C6.1@50.038,93.472 ; C6.1@49.657,94.107 ccw(c49.657,95.64) 50.741,94.556 ccw(c51.825,93.472) C6.1@50.292,93.472 ; U6.2@55.025,99.324 ccw(c54.61,99.091) 54.61,99.567 ; U6.2@55.025,99.81 cw(c54.61,100.043) 54.61,99.567 ; U6.2@55.622,99.567 54.61,99.567
NetC7_1: C7.1 U6.4 | length 14
  Top Layer w0.254: C7.1@49.657,88.392 53.772,92.507 53.772,93.649 54.61,94.487 ; C7.1@49.657,88.773 ccw(c49.657,89.693) 50.307,89.042 ccw(c50.958,88.392) C7.1@50.038,88.392 ; C7.1@49.657,89.027 ccw(c49.657,90.56) 50.741,89.476 ccw(c51.825,88.392) C7.1@50.292,88.392 ; U6.4@55.025,94.244 ccw(c54.61,94.011) 54.61,94.487 ; U6.4@55.025,94.73 cw(c54.61,94.963) 54.61,94.487 ; U6.4@55.622,94.487 54.61,94.487
NetC7_2: C7.2 U6.5 | length 12.2
  Bottom Layer w0.254: C7.2@51.494,88.841 ccw(c50.41,89.925) 51.943,89.925 ccw(c53.476,89.925) C7.2@52.392,88.841 ; C7.2@51.674,88.661 ccw(c51.023,89.312) 51.943,89.312 ccw(c52.863,89.312) C7.2@52.212,88.661 ; C7.2@51.943,88.392 51.943,90.55 53.34,91.947 U6.5@55.622,91.947 ; U6.5@55.108,91.595 ccw(c54.258,90.745) 54.258,91.947 ccw(c54.258,93.149) U6.5@55.108,92.299
NetC8_2: C8.2 U6.6 | length 13.2
  Top Layer w0.254: C8.2@51.943,83.312 53.442,84.811 53.442,88.265 54.584,89.407 ; C8.2@51.943,83.693 ccw(c51.943,84.613) 52.593,83.962 ccw(c53.244,83.312) C8.2@52.324,83.312 ; C8.2@51.943,83.947 ccw(c51.943,85.48) 53.027,84.396 ccw(c54.111,83.312) C8.2@52.578,83.312 ; U6.6@55.032,89.152 ccw(c54.584,88.885) 54.584,89.407 ; U6.6@55.032,89.662 cw(c54.584,89.929) 54.584,89.407 ; U6.6@55.622,89.407 54.584,89.407
NetD0_1: D0.1 L1.1 U1.2 | length 22
  Top Layer w0.8: L1.1@76.276,103.454 77.548,104.726 U1.2@77.548,113.411 ; L1.1@76.276,103.816 ccw(c76.276,104.69) 76.894,104.072 ccw(c77.512,103.454) L1.1@76.638,103.454 ; U1.2@77.336,112.899 cw(c76.824,112.387) 77.548,112.387 cw(c78.272,112.387) U1.2@77.76,112.899
  Bottom Layer w0.8: D0.1@70.688,103.708 73.914,103.708 74.168,103.454 L1.1@76.276,103.454 ; D0.1@71.05,103.346 cw(c71.924,102.472) 71.924,103.708 cw(c71.924,104.944) D0.1@71.05,104.07 ; L1.1@76.02,103.198 ccw(c75.402,102.58) 75.402,103.454 ccw(c75.402,104.328) L1.1@76.02,103.71
NetD1_2: D1.2 K1.4 U2.3 | length 82.8
  Top Layer w0.254: D1.2@163.946,75.708 cw(c162.882,74.645) 164.386,74.645 cw(c165.89,74.645) D1.2@164.827,75.708 ; D1.2@164.125,75.888 cw(c163.495,75.258) 164.386,75.258 cw(c165.277,75.258) D1.2@164.647,75.888 ; D1.2@164.386,76.149 164.386,72.974 K1.4@166.74,70.62 ; K1.4@165.867,70.62 ccw(c163.759,70.62) 165.25,72.11 ccw(c166.74,73.601) K1.4@166.74,71.493 ; K1.4@166.121,70.62 ccw(c164.627,70.62) 165.683,71.677 ccw(c166.74,72.733) K1.4@166.74,71.239
  Bottom Layer w0.254: U2.3@107.188,80.657 cw(c107.188,79.153) 108.252,80.216 cw(c109.315,81.28) U2.3@107.811,81.28 ; U2.3@107.188,80.911 cw(c107.188,80.02) 107.818,80.65 cw(c108.448,81.28) U2.3@107.557,81.28 ; U2.3@107.188,81.28 109.626,78.842 161.693,78.842 D1.2@164.386,76.149 ; D1.2@163.763,76.149 ccw(c162.259,76.149) 163.323,77.212 ccw(c164.386,78.276) D1.2@164.386,76.772 ; D1.2@164.017,76.149 ccw(c163.126,76.149) 163.756,76.779 ccw(c164.386,77.409) D1.2@164.386,76.518
NetD2_2: D2.2 K2.4 U3.3 | length 71.2
  Top Layer w0.254: D2.2@147.182,75.708 cw(c146.118,74.645) 147.622,74.645 cw(c149.126,74.645) D2.2@148.063,75.708 ; D2.2@147.361,75.888 cw(c146.731,75.258) 147.622,75.258 cw(c148.513,75.258) D2.2@147.883,75.888 ; D2.2@147.622,76.149 147.622,72.803 K2.4@149.932,70.493 ; K2.4@149.059,70.493 ccw(c146.951,70.493) 148.442,71.983 ccw(c149.932,73.474) K2.4@149.932,71.366 ; K2.4@149.313,70.493 ccw(c147.819,70.493) 148.875,71.55 ccw(c149.932,72.606) K2.4@149.932,71.112
  Bottom Layer w0.254: U3.3@102.108,80.657 cw(c102.108,79.153) 103.172,80.216 cw(c104.235,81.28) U3.3@102.731,81.28 ; U3.3@102.108,80.911 cw(c102.108,80.02) 102.738,80.65 cw(c103.368,81.28) U3.3@102.477,81.28 ; U3.3@102.108,81.28 104.521,78.867 108.331,78.867 109.318,77.88 145.891,77.88 D2.2@147.622,76.149 ; D2.2@146.999,76.149 ccw(c145.495,76.149) 146.559,77.212 ccw(c147.622,78.276) D2.2@147.622,76.772 ; D2.2@147.253,76.149 ccw(c146.362,76.149) 146.992,76.779 ccw(c147.622,77.409) D2.2@147.622,76.518
NetD3_2: D3.2 K3.4 U5.3 | length 59.2
  Top Layer w0.254: D3.2@129.91,75.708 cw(c128.846,74.645) 130.35,74.645 cw(c131.854,74.645) D3.2@130.791,75.708 ; D3.2@130.089,75.888 cw(c129.459,75.258) 130.35,75.258 cw(c131.241,75.258) D3.2@130.611,75.888 ; D3.2@130.35,76.149 130.35,73.267 K3.4@133.124,70.493 ; K3.4@132.251,70.493 ccw(c130.143,70.493) 131.634,71.983 ccw(c133.124,73.474) K3.4@133.124,71.366 ; K3.4@132.505,70.493 ccw(c131.011,70.493) 132.067,71.55 ccw(c133.124,72.606) K3.4@133.124,71.112
  Bottom Layer w0.254: U5.3@97.028,80.657 cw(c97.028,79.153) 98.092,80.216 cw(c99.155,81.28) U5.3@97.651,81.28 ; U5.3@97.028,80.911 cw(c97.028,80.02) 97.658,80.65 cw(c98.288,81.28) U5.3@97.397,81.28 ; U5.3@97.028,81.28 100.428,77.88 108.245,77.88 108.799,77.326 129.173,77.326 D3.2@130.35,76.149 ; D3.2@129.727,76.149 ccw(c128.223,76.149) 129.287,77.212 ccw(c130.35,78.276) D3.2@130.35,76.772 ; D3.2@129.981,76.149 ccw(c129.09,76.149) 129.72,76.779 ccw(c130.35,77.409) D3.2@130.35,76.518
NetD4_2: D4.2 K4.4 U7.3 | length 47.8
  Top Layer w0.254: D4.2@113.654,75.708 cw(c112.59,74.645) 114.094,74.645 cw(c115.598,74.645) D4.2@114.535,75.708 ; D4.2@113.833,75.888 cw(c113.203,75.258) 114.094,75.258 cw(c114.985,75.258) D4.2@114.355,75.888 ; D4.2@114.094,76.149 114.094,72.715 K4.4@116.316,70.493 ; K4.4@115.443,70.493 ccw(c113.335,70.493) 114.826,71.983 ccw(c116.316,73.474) K4.4@116.316,71.366 ; K4.4@115.697,70.493 ccw(c114.203,70.493) 115.259,71.55 ccw(c116.316,72.606) K4.4@116.316,71.112
  Bottom Layer w0.254: U7.3@91.948,80.657 cw(c91.948,79.153) 93.012,80.216 cw(c94.075,81.28) U7.3@92.571,81.28 ; U7.3@91.948,80.911 cw(c91.948,80.02) 92.578,80.65 cw(c93.208,81.28) U7.3@92.317,81.28 ; U7.3@91.948,81.28 95.902,77.326 107.696,77.326 108.873,76.149 D4.2@114.094,76.149 ; D4.2@113.654,75.708 ccw(c112.59,74.645) 112.59,76.149 ccw(c112.59,77.653) D4.2@113.654,76.589 ; D4.2@113.833,75.888 ccw(c113.203,75.258) 113.203,76.149 ccw(c113.203,77.04) D4.2@113.833,76.41
NetD5_2: D5.2 K5.4 U8.3 | length 37.7
  Top Layer w0.254: D5.2@96.89,75.708 cw(c95.826,74.645) 97.33,74.645 cw(c98.834,74.645) D5.2@97.771,75.708 ; D5.2@97.069,75.888 cw(c96.439,75.258) 97.33,75.258 cw(c98.221,75.258) D5.2@97.591,75.888 ; D5.2@97.33,76.149 97.33,72.671 K5.4@99.508,70.493 ; K5.4@98.635,70.493 ccw(c96.527,70.493) 98.018,71.983 ccw(c99.508,73.474) K5.4@99.508,71.366 ; K5.4@98.889,70.493 ccw(c97.395,70.493) 98.451,71.55 ccw(c99.508,72.606) K5.4@99.508,71.112
  Bottom Layer w0.254: U8.3@85.217,80.657 cw(c85.217,79.153) 86.281,80.216 cw(c87.344,81.28) U8.3@85.84,81.28 ; U8.3@85.217,80.911 cw(c85.217,80.02) 85.847,80.65 cw(c86.477,81.28) U8.3@85.586,81.28 ; U8.3@85.217,81.28 87.782,78.715 90.119,78.715 92.685,76.149 D5.2@97.33,76.149 ; D5.2@96.89,75.708 ccw(c95.826,74.645) 95.826,76.149 ccw(c95.826,77.653) D5.2@96.89,76.589 ; D5.2@97.069,75.888 ccw(c96.439,75.258) 96.439,76.149 ccw(c96.439,77.04) D5.2@97.069,76.41
NetD6_2: D6.2 K6.4 U9.3 | length 28.8
  Top Layer w0.254: U9.3@79.696,80.839 cw(c78.633,79.776) 80.137,79.776 cw(c81.641,79.776) U9.3@80.578,80.839 ; U9.3@79.876,81.019 cw(c79.246,80.389) 80.137,80.389 cw(c81.028,80.389) U9.3@80.398,81.019 ; D6.2@80.126,75.708 cw(c79.062,74.645) 80.566,74.645 cw(c82.07,74.645) D6.2@81.007,75.708 ; D6.2@80.126,76.589 ccw(c79.062,77.653) 80.566,77.653 ccw(c82.07,77.653) D6.2@81.007,76.589 ; U9.3@80.137,81.28 80.137,78.915 80.566,78.486 D6.2@80.566,76.149 80.566,72.627 K6.4@82.7,70.493 ; D6.2@80.305,75.888 cw(c79.675,75.258) 80.566,75.258 cw(c81.457,75.258) D6.2@80.827,75.888 ; D6.2@80.305,76.41 ccw(c79.675,77.04) 80.566,77.04 ccw(c81.457,77.04) D6.2@80.827,76.41 ; K6.4@81.827,70.493 ccw(c79.719,70.493) 81.21,71.983 ccw(c82.7,73.474) K6.4@82.7,71.366 ; K6.4@82.081,70.493 ccw(c80.587,70.493) 81.643,71.55 ccw(c82.7,72.606) K6.4@82.7,71.112
NetD7_2: D7.2 K7.4 U10.3 | length 36.8
  Top Layer w0.254: D7.2@63.802,75.526 cw(c63.802,74.022) 64.866,75.085 cw(c65.929,76.149) D7.2@64.425,76.149 ; D7.2@63.802,75.78 cw(c63.802,74.889) 64.432,75.519 cw(c65.062,76.149) D7.2@64.171,76.149 ; D7.2@63.802,76.149 65.892,74.059 K7.4@65.892,70.493 ; K7.4@65.275,71.11 ccw(c63.784,72.601) 65.892,72.601 ccw(c68,72.601) K7.4@66.509,71.11 ; K7.4@65.454,70.931 ccw(c64.398,71.987) 65.892,71.987 ccw(c67.386,71.987) K7.4@66.33,70.931
  Bottom Layer w0.254: D7.2@63.802,76.149 69.926,76.149 U10.3@75.057,81.28 ; D7.2@64.063,75.888 cw(c64.693,75.258) 64.693,76.149 cw(c64.693,77.04) D7.2@64.063,76.41 ; D7.2@64.243,75.708 cw(c65.306,74.645) 65.306,76.149 cw(c65.306,77.653) D7.2@64.243,76.589 ; U10.3@74.434,81.28 cw(c72.93,81.28) 73.993,80.216 cw(c75.057,79.153) U10.3@75.057,80.657 ; U10.3@74.688,81.28 cw(c73.797,81.28) 74.427,80.65 cw(c75.057,80.02) U10.3@75.057,80.911
NetD8_2: D8.2 K8.4 U11.3 | length 48.5
  Top Layer w0.254: D8.2@46.598,75.708 cw(c45.534,74.645) 47.038,74.645 cw(c48.542,74.645) D8.2@47.479,75.708 ; D8.2@46.777,75.888 cw(c46.147,75.258) 47.038,75.258 cw(c47.929,75.258) D8.2@47.299,75.888 ; D8.2@47.038,76.149 47.038,72.539 K8.4@49.084,70.493 ; K8.4@48.211,70.493 ccw(c46.103,70.493) 47.594,71.983 ccw(c49.084,73.474) K8.4@49.084,71.366 ; K8.4@48.465,70.493 ccw(c46.971,70.493) 48.027,71.55 ccw(c49.084,72.606) K8.4@49.084,71.112
  Bottom Layer w0.254: D8.2@47.038,76.149 52.17,81.28 U11.3@69.977,81.28 ; D8.2@47.038,76.518 ccw(c47.038,77.409) 47.668,76.779 ccw(c48.298,76.149) D8.2@47.407,76.149 ; D8.2@47.038,76.772 ccw(c47.038,78.276) 48.102,77.212 ccw(c49.165,76.149) D8.2@47.661,76.149 ; U11.3@69.536,80.839 ccw(c68.473,79.776) 68.473,81.28 ccw(c68.473,82.784) U11.3@69.536,81.721 ; U11.3@69.716,81.019 ccw(c69.086,80.389) 69.086,81.28 ccw(c69.086,82.171) U11.3@69.716,81.541
NetJ1_2: J1.2 U6.14 | length 30.3
  Bottom Layer w0.254: J1.2@45.508,90.194 ccw(c43.775,90.194) 45,91.42 ccw(c46.226,92.645) J1.2@46.226,90.912 ; J1.2@45.762,90.194 ccw(c44.642,90.194) 45.434,90.986 ccw(c46.226,91.778) J1.2@46.226,90.658 ; J1.2@46.226,90.194 44.933,91.487 44.933,93.65 45.72,94.437 47.003,94.437 48.831,96.266 53.391,96.266 53.696,95.961 58.522,95.961 59.587,97.027 U6.14@63.242,97.027 ; U6.14@62.728,96.675 ccw(c61.878,95.825) 61.878,97.027 ccw(c61.878,98.229) U6.14@62.728,97.379
NetJ1_3: J1.3 U6.13 | length 22.4
  Bottom Layer w0.254: J1.3@46.226,92.964 47.287,92.964 ; J1.3@46.893,92.697 cw(c47.287,92.539) 47.287,92.964 ; J1.3@46.893,93.231 ccw(c47.287,93.389) 47.287,92.964 ; U6.13@62.728,94.135 ccw(c61.878,93.285) 61.878,94.487 ccw(c61.878,95.689) U6.13@62.728,94.839 ; U6.13@63.242,94.487 59.436,94.487 58.167,93.218 54.534,93.218 52.248,95.504 49.827,95.504 47.287,92.964
NetK1_1: K1.1 OUT1.2 | length 17
  Top Layer w2.2: OUT1.2@153.416,43.053 152.146,44.323 152.146,53.057 154.74,55.651 K1.1@154.74,58.42
NetK1_3: K1.3 OUT1.1 | length 36.7
  Top Layer w2.2: OUT1.1@158.496,43.053 160.057,44.614 160.057,52.451 159.512,52.996 159.512,71.392 K1.3@160.74,72.62 ; 159.512,69.293 cw(c164.067,69.293) K1.3@160.846,72.514 ; 159.512,70.883 cw(c161.145,70.883) K1.3@160.774,72.474
NetK2_1: K2.1 OUT2.2 | length 22.2
  Top Layer w2.2: 136.677,54.902 cw(c141.323,54.902) K2.1@138.038,58.187 ; 136.677,56.519 cw(c138.35,56.519) K2.1@137.966,58.147 ; K2.1@137.932,58.293 136.677,57.038 136.677,44.497 OUT2.2@138.121,43.053
NetK2_3: K2.3 OUT2.1 | length 30
  Top Layer w2.2: OUT2.1@143.201,43.053 144.272,44.124 144.272,56.667 143.932,57.007 K2.3@143.932,72.493
NetK3_1: K3.1 OUT3.2 | length 15.9
  Top Layer w2.2: K3.1@121.124,58.293 121.124,44.756 OUT3.2@122.827,43.053
NetK3_3: K3.3 OUT3.1 | length 31.1
  Top Layer w2.2: K3.3@127.124,72.493 129.54,70.077 129.54,44.686 OUT3.1@127.907,43.053
NetK4_1: K4.1 OUT4.2 | length 16.6
  Top Layer w2.2: K4.1@104.316,58.293 104.316,46.27 OUT4.2@107.533,43.053
NetK4_3: K4.3 OUT4.1 | length 36.1
  Top Layer w2.2: K4.3@110.316,72.493 112.37,70.439 112.37,55.499 113.792,54.077 113.792,44.232 ; OUT4.1@112.613,43.053 113.792,44.232 ; OUT4.1@112.645,42.868 ccw(c112.407,44.232) 113.792,44.232 ; OUT4.1@112.746,42.92 ccw(c110.219,45.447) 113.792,45.447
NetK5_1: K5.1 OUT5.2 | length 17.2
  Top Layer w2.2: K5.1@87.508,58.293 87.508,47.783 OUT5.2@92.238,43.053
NetK5_3: K5.3 OUT5.1 | length 37
  Top Layer w2.2: K5.3@93.508,72.493 93.508,59.171 98.552,54.127 98.552,44.287 OUT5.1@97.318,43.053 ; OUT5.1@97.349,42.868 ccw(c97.113,44.287) 98.552,44.287 ; OUT5.1@97.451,42.92 ccw(c94.793,45.578) 98.552,45.578
NetK6_1: K6.1 OUT6.2 | length 17.8
  Top Layer w2.2: K6.1@70.7,58.293 70.7,49.297 OUT6.2@76.944,43.053
NetK6_3: K6.3 OUT6.1 | length 33
  Top Layer w2.2: K6.3@76.7,72.493 75.032,70.825 75.032,50.045 OUT6.1@82.024,43.053
NetK7_1: K7.1 OUT7.2 | length 18.6
  Top Layer w2.2: K7.1@53.892,58.293 53.892,50.683 OUT7.2@61.649,42.926
NetK7_3: K7.3 OUT7.1 | length 38.4
  Top Layer w2.2: K7.3@59.892,72.493 59.892,58.929 64.281,54.541 66.363,54.541 67.564,53.34 67.564,45.205 66.729,44.37 ; OUT7.1@66.541,42.926 cw(c69.574,42.926) 67.43,45.07 ; OUT7.1@66.572,42.822 cw(c67.599,43.5) 66.729,44.37 ; OUT7.1@66.729,42.926 66.729,44.37
NetK8_1: K8.1 OUT8.2 | length 19.2
  Top Layer w2.2: K8.1@37.084,58.293 38.964,56.413 38.964,50.317 OUT8.2@46.355,42.926
NetK8_3: K8.3 OUT8.1 | length 33
  Top Layer w2.2: K8.3@43.084,72.493 43.084,51.277 OUT8.1@51.435,42.926
NetKEY1_1: KEY1.1 Power.1 | length 8.7
  Bottom Layer w1.254: Power.1@54.102,113.919 55.245,112.776 KEY1.1@62.357,112.776
NetKEY1_6: KEY1.6 Power.2 | length 15
  Bottom Layer w1.254: Power.2@49.022,113.919 52.959,117.856 KEY1.6@62.357,117.856
NetLED_1: LED.1 R1.1 | length 25.4
  Bottom Layer w0.254: LED.1@66.04,107.188 75.844,107.188 76.048,107.391 R1.1@86.055,107.391 ; LED.1@66.392,106.836 cw(c67.242,105.986) 67.242,107.188 cw(c67.242,108.39) LED.1@66.392,107.54 ; R1.1@85.65,106.986 ccw(c84.672,106.008) 84.672,107.391 ccw(c84.672,108.775) R1.1@85.65,107.796 ; R1.1@85.83,107.166 ccw(c85.285,106.621) 85.285,107.391 ccw(c85.285,108.161) R1.1@85.83,107.617
NetPB1_1: PB0.1 U8.2 | length 50.8
  Top Layer w0.254: U8.2@84.776,88.459 cw(c83.713,87.396) 85.217,87.396 cw(c86.721,87.396) U8.2@85.658,88.459 ; U8.2@84.956,88.639 cw(c84.326,88.009) 85.217,88.009 cw(c86.108,88.009) U8.2@85.478,88.639 ; U8.2@85.217,88.9 85.217,86.284 91.796,79.705 91.796,54.889 PB0.1@96.393,50.292 ; PB0.1@95.77,50.292 ccw(c94.266,50.292) 95.329,51.356 ccw(c96.393,52.419) PB0.1@96.393,50.915 ; PB0.1@96.024,50.292 ccw(c95.133,50.292) 95.763,50.922 ccw(c96.393,51.552) PB0.1@96.393,50.661
NetPB2_1: PB1.1 U9.2 | length 47.5
  Top Layer w0.254: U9.2@79.514,88.9 cw(c78.01,88.9) 79.073,87.836 cw(c80.137,86.773) U9.2@80.137,88.277 ; U9.2@79.768,88.9 cw(c78.877,88.9) 79.507,88.27 cw(c80.137,87.64) U9.2@80.137,88.531 ; U9.2@80.137,88.9 78.943,87.706 78.943,52.502 PB1.1@81.153,50.292 ; PB1.1@80.53,50.292 ccw(c79.026,50.292) 80.089,51.356 ccw(c81.153,52.419) PB1.1@81.153,50.915 ; PB1.1@80.784,50.292 ccw(c79.893,50.292) 80.523,50.922 ccw(c81.153,51.552) PB1.1@81.153,50.661